# Altium PCB rookieboard_macrofab.PcbDoc (part 1 of 3)
Units mm, origin at the board's own origin, x right, y up, seen from the top; angles counter-clockwise.
Board outline 100 x 50 mm, 4 copper layers (Top Layer, Ground, Power, Bottom Layer), stack 0.971 mm thick; 136 components, 90 nets, 459 pads, 215 vias.
Unrouted connection lines stored in the file: 2.
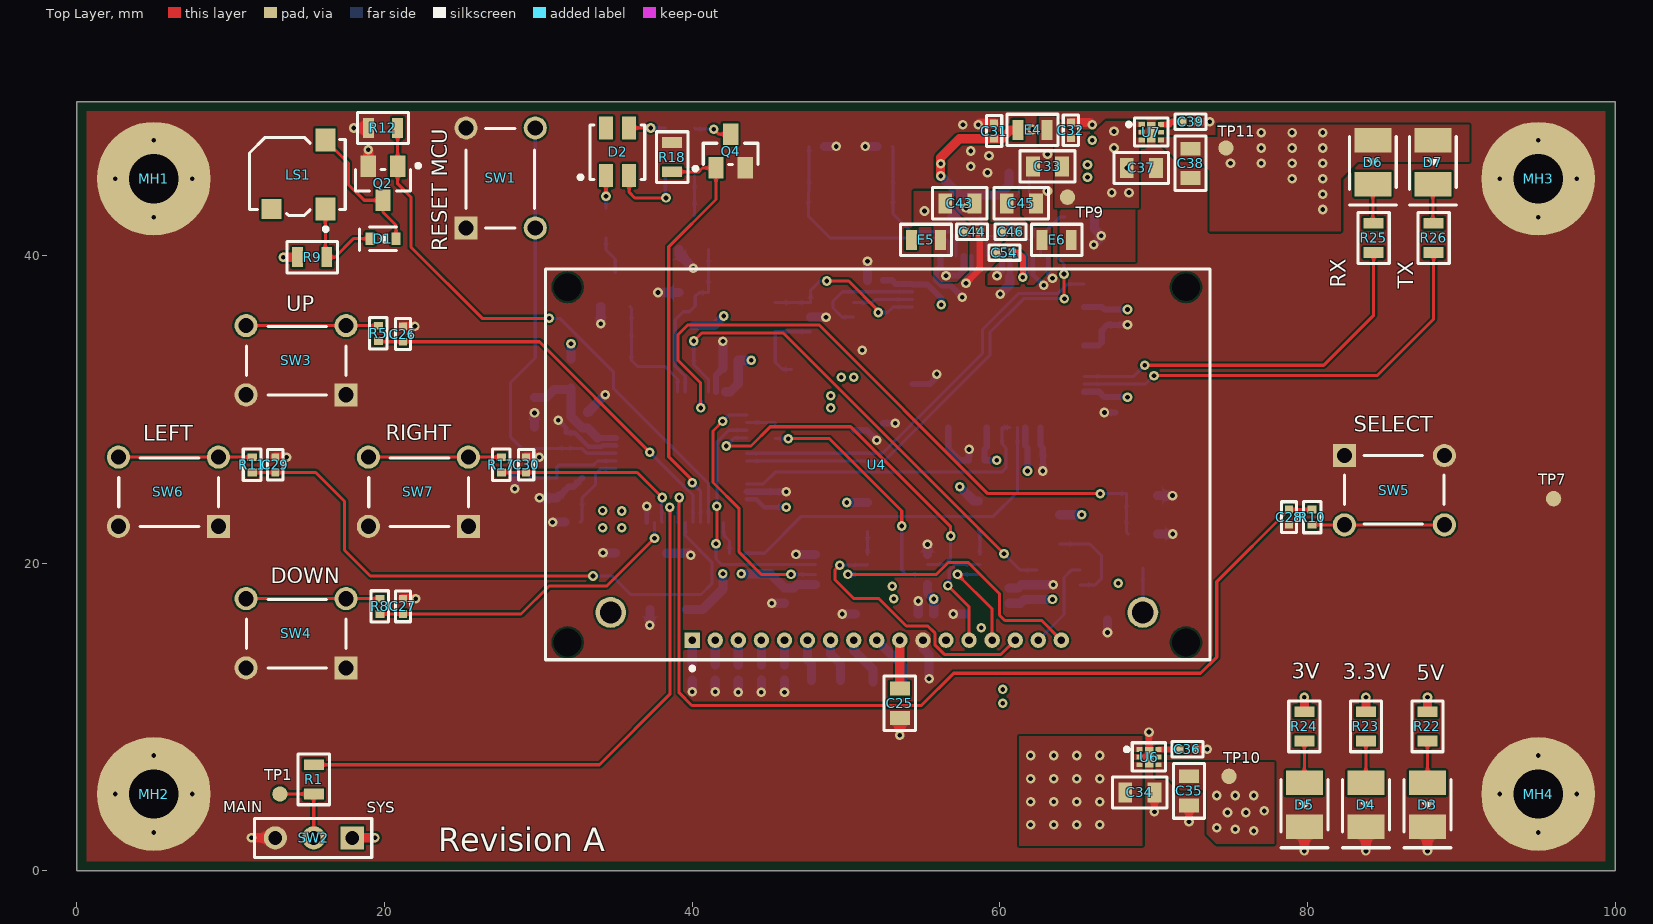
[diagram p0: Top Layer view]
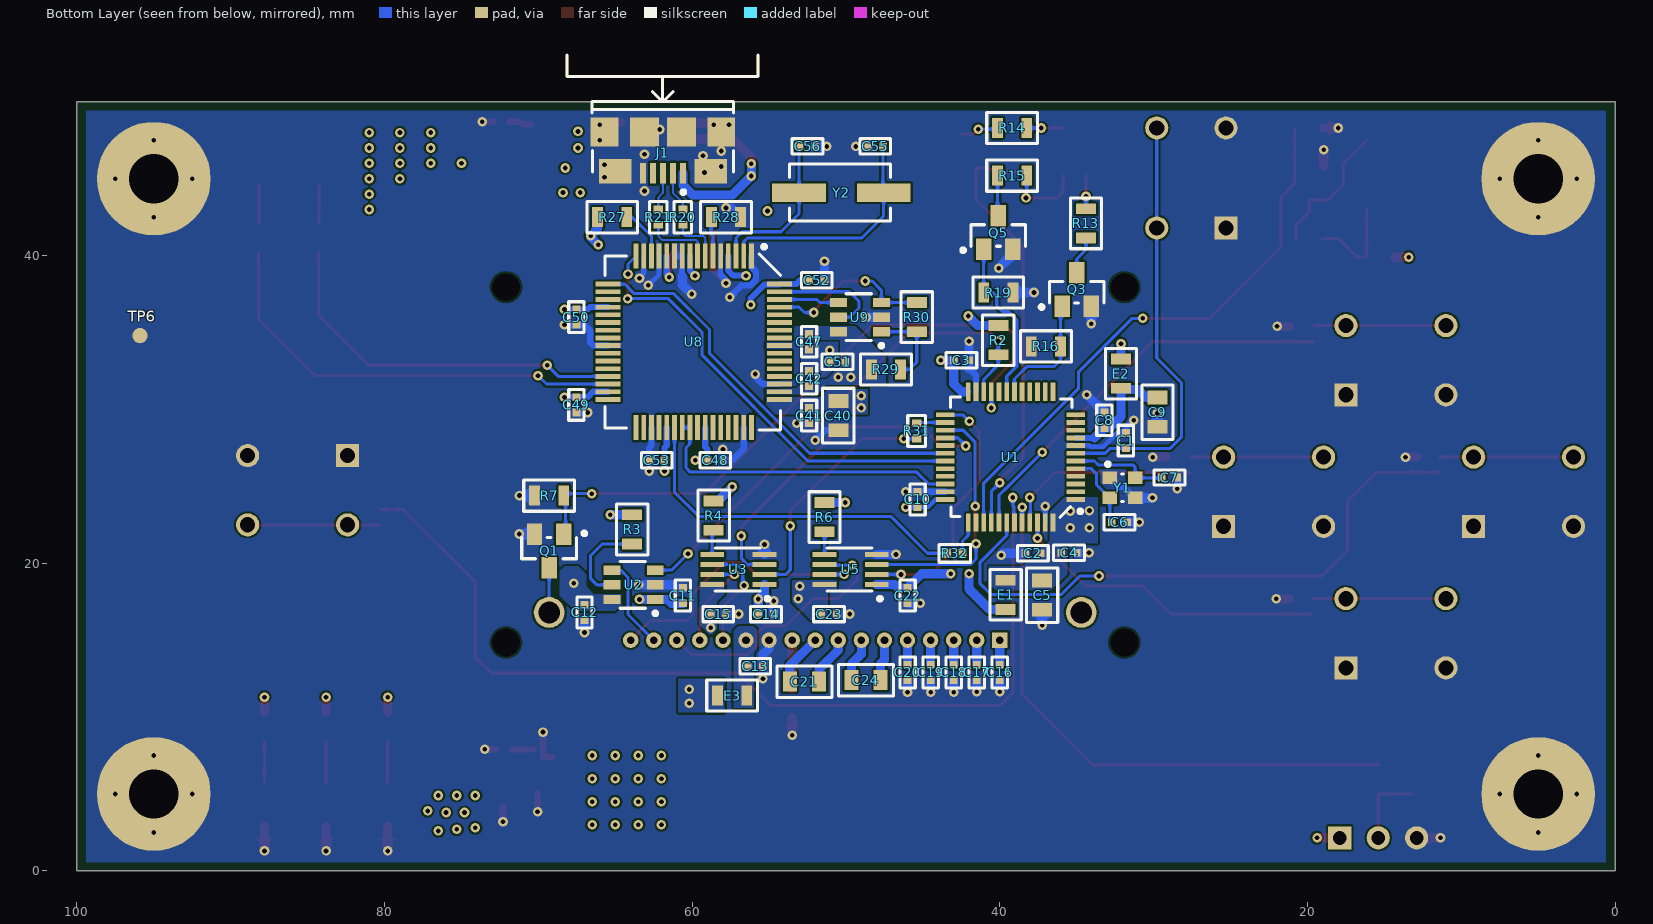
[diagram p1: Bottom Layer view, seen from below]
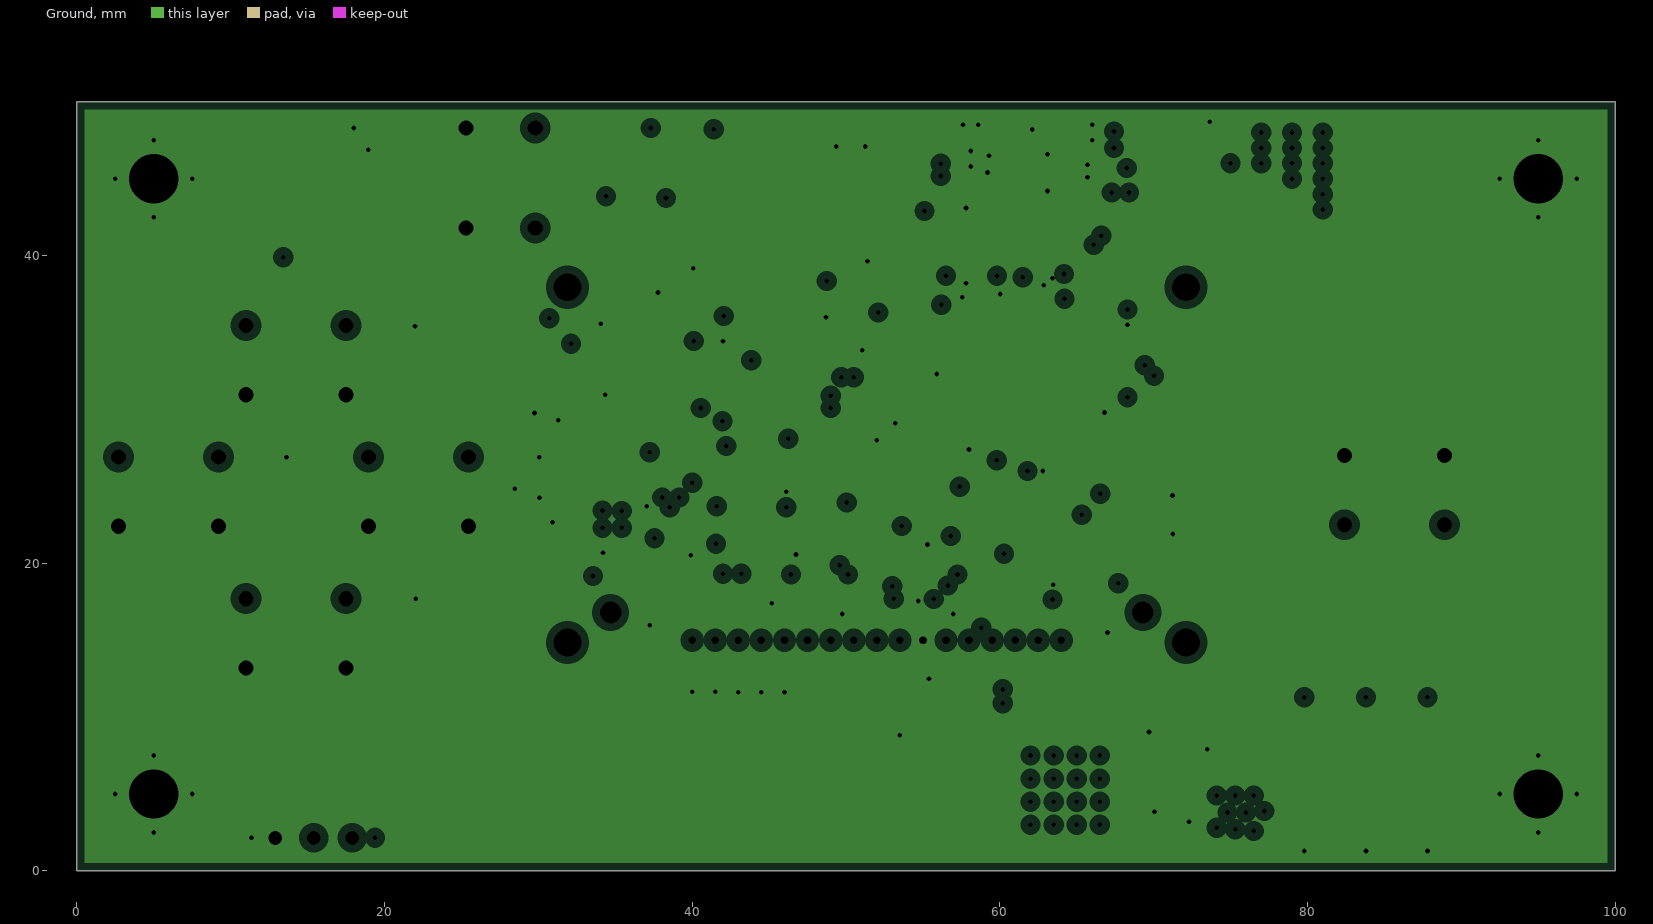
[diagram p2: Ground, clearances drawn from the general rule]
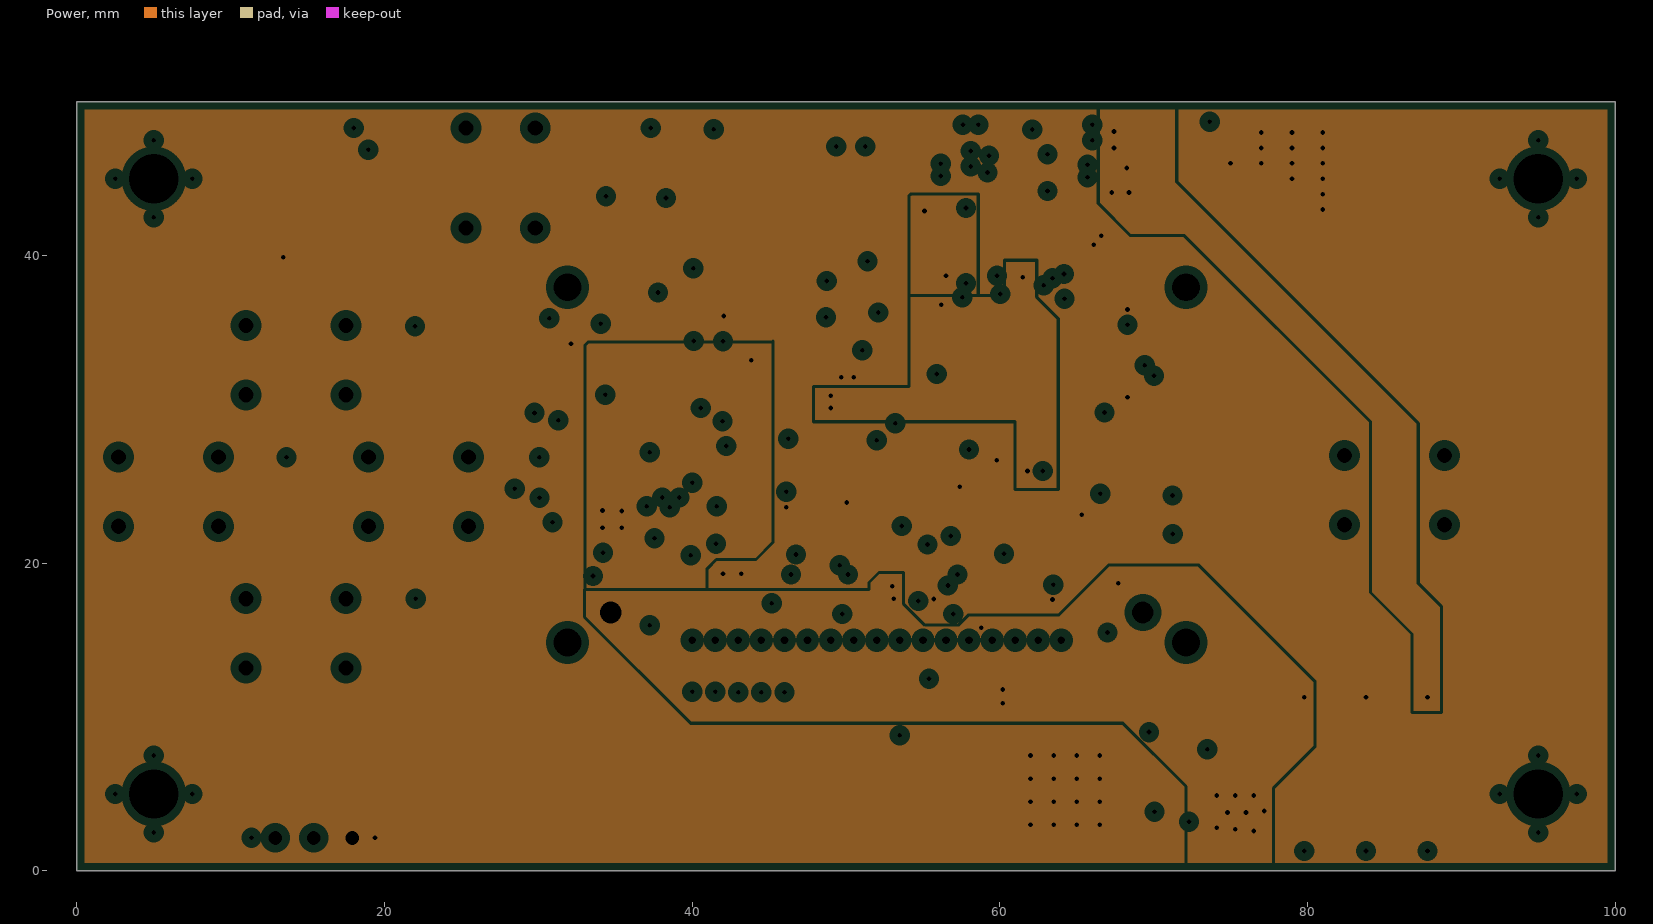
[diagram p3: Power, clearances drawn from the general rule]

## Layer stack, top to bottom
Top Solder: solder mask 0.0102, Solder Resist, Dk 3.5
Top Layer: signal copper 0.0356
Dielectric 1: dielectric 0.32, FR-4, Dk 4.8
Ground: plane copper 0.036, net GND
Dielectric 2: dielectric 0.254, Dk 4.2
Power: plane copper 0.036, net (Multiple Nets)
Dielectric 3: dielectric 0.254, Dk 4.2
Bottom Layer: signal copper 0.0356
Bottom Solder: solder mask 0.0102, Solder Resist, Dk 3.5

## Board outline
0,0 100,0 100,50 0,50

## Design rules (kind name [scope] priority, off if disabled: settings)
BoardOutlineClearance [InNetClass('All Nets')] p1: gap=0.254 ignorepadtopadclearanceinfootprint=FALSE
Clearance "Stitching +3V3" [IsStitchingVia and InNet('+3V3') vs (IsVia and (Not IsStitchingVia)) Or IsPad] p1: gap=0.127 ignorepadtopadclearanceinfootprint=FALSE
Clearance [All] p2: gap=0.127 ignorepadtopadclearanceinfootprint=FALSE
ComponentClearance [All] p1: gap=0.127 collisioncheckmode=3 verticalgap=0.127 showdistances=FALSE
HoleSize [All] p1: absolutevalues=TRUE maxlimit=10 minlimit=0.305 maxpercent=80.000 minpercent=20.000
HoleToHoleClearance [All] p1: gap=0.127 allowstackedmicrovias=TRUE
MinimumAnnularRing [All] p1: minimumring=0.16
MinimumSolderMaskSliver [All] p1: minsoldermaskwidth=0.1
PlaneClearance [All] p1: clearance=0.508
PlaneConnect [All] p1: planeconnectstyle=Direct reliefexpansion=0.508 reliefentries=4 reliefconductorwidth=0.254 reliefairgap=0.254
PolygonConnect [All] p1: connectstyle=Direct reliefconductorwidth=0.254 reliefentries=4 polygonreliefangle="90 Angle" airgapwidth=0.254
RoutingVias [All] p1: holewidth=0.305 width=0.625 viastyle="Through Hole" minholewidth=0.305 minwidth=0.625 maxholewidth=0.305 maxwidth=0.625
SilkToSilkClearance [All] p1: silktosilkclearance=0.1
SilkToSolderMaskClearance [IsPad] p1: minsilkscreentomaskgap=0.1 clearancetoexposedcopper=TRUE
SolderMaskExpansion [All] p1: expansion=0.1
UnRoutedNet [All] p1: checkbadconnections=TRUE
Width [All] p1: maxlimit=1 minlimit=0.127 preferedwidth=0.2
21 further rules are at their usual default settings.

## Components (designator, comment, footprint, x,y, rotation, side; value= is the part's Value field where it differs from the comment)
C1 "100n" C0402 31.8,27.975 r270 bottom
C2 "100n" C0402 37.85,20.65 r180 bottom
C3 "100n" C0402 42.5,33.2 r0 bottom
C4 "100n" C0402 35.5,20.675 r0 bottom
C5 "4u7 / 10V" C0805 37.25,17.925 r90 bottom
C6 "10p" C0402 32.225,22.675 r0 bottom
C7 "10p" C0402 28.975,25.575 r0 bottom
C8 "100n" C0402 33.2,29.3 r270 bottom
C9 "1u / 16V" C0805 29.75,29.825 r90 bottom
C10 "100n" C0402 45.35,24.15 r270 bottom
C11 "100n" C0402 60.6,17.9 r270 bottom
C12 "100n" C0402 67,16.8 r270 bottom
C13 "100n" C0402 55.9,13.3 r0 bottom
C14 "100n" C0402 55.2,16.7 r0 bottom
C15 "100n" C0402 58.3,16.7 r0 bottom
C16 "100n" C0402 40,12.9 r270 bottom
C17 "100n" C0402 41.5,12.9 r270 bottom
C18 "100n" C0402 43,12.9 r270 bottom
C19 "100n" C0402 44.5,12.9 r270 bottom
C20 "100n" C0402 46,12.9 r270 bottom
C21 "1u / 16V" C0805 52.7,12.3 r0 bottom
C22 "100n" C0402 46,17.9 r90 bottom
C23 "100n" C0402 51.1,16.7 r0 bottom
C24 "1u / 16V" C0805 48.7,12.4 r180 bottom
C25 "1u / 16V" C0805 53.5,10.9 r90 top
C26 "100n" C0402 21.2,34.9 r270 top
C27 "100n" C0402 21.2,17.2 r270 top
C28 "100n" C0402 78.8,23 r90 top
C29 "100n" C0402 12.9,26.4 r270 top
C30 "100n" C0402 29.2,26.4 r270 top
C31 "10n" C0402 59.625,48.1 r270 top
C32 "100n" C0402 64.625,48.15 r270 top
C33 "4u7 / 10V" C0805 63.1,45.8 r0 top
C34 "1u / 16V" C0805 69.1,5.1 r180 top
C35 "1u / 16V" C0805 72.3,5.2 r90 top
C36 "100n" C0402 72.2,7.9 r180 top
C37 "1u / 16V" C0805 69.2,45.7 r180 top
C38 "1u / 16V" C0805 72.4,46 r90 top
C39 "100n" C0402 72.4,48.7 r180 top
C40 "4u7 / 10V" C0805 50.5,29.6 r90 bottom
C41 "100n" C0402 52.4,29.6 r90 bottom
C42 "100n" C0402 52.4,32 r270 bottom
C43 "4u7 / 10V" C0805 57.4,43.4 r180 top
C44 "100n" C0402 58.2,41.55 r180 top
C45 "4u7 / 10V" C0805 61.4,43.4 r180 top
C46 "100n" C0402 60.7,41.55 r0 top
C47 "100n" C0402 52.4,34.4 r90 bottom
C48 "100n" C0402 58.5,26.7 r0 bottom
C49 "100n" C0402 67.525,30.3 r90 bottom
C50 "100n" C0402 67.525,36 r90 bottom
C51 "100n" C0402 50.55,33.1 r180 bottom
C52 "100n" C0402 51.9,38.4 r0 bottom
C53 "100n" C0402 62.3,26.7 r180 bottom
C54 "100n" C0402 60.3,40.2 r0 top
C55 "27p" C0402 48.1,47.1 r180 bottom
C56 "27p" C0402 52.5,47.1 r0 bottom
D1 "ZHCS350TA" DIODE_SOD-523 19.9,41.1 r0 top
D2 "SMTL4-RGY" SMTL4-RGY 35.15,46.75 r180 top
D3 "Green" 150141VS73100_LED 87.8,4.3 r90 top
D4 "Green" 150141VS73100_LED 83.8,4.3 r90 top
D5 "Green" 150141VS73100_LED 79.8,4.3 r90 top
D6 "Green" 150141VS73100_LED 84.25,46.075 r90 top
D7 "Green" 150141VS73100_LED 88.15,46.075 r90 top
E1 "BLM21PG221SN1D" R0805 39.625,17.95 r90 bottom
E2 "BLM21PG221SN1D" R0805 32.125,32.325 r270 bottom
E3 "BLM21PG221SN1D" R0805 57.4,11.4 r180 bottom
E4 "BLM21PG221SN1D" R0805 62.125,48.175 r0 top
E5 "BLM21PG221SN1D" R0805 55.2,41.025 r0 top
E6 "BLM21PG221SN1D" R0805 63.7,41.025 r180 top
J1 "10118192-0001LF" 10118192-0001LF 61.9,46.7 r0 bottom locked
LS1 "SMT-0540-S-R" SMT-0540-S-R 14.4,45.273 r90 top
MH1 "Mounting Hole 7.4mm, 3.2mm" MH_7.4mm_3.2mm 5,45 r0 top locked
MH2 "Mounting Hole 7.4mm, 3.2mm" MH_7.4mm_3.2mm 5,5 r0 top locked
MH3 "Mounting Hole 7.4mm, 3.2mm" MH_7.4mm_3.2mm 95,45 r0 top locked
MH4 "Mounting Hole 7.4mm, 3.2mm" MH_7.4mm_3.2mm 95,5 r0 top locked
Q1 "FDV305N" FDV305N_SOT-23-3 69.3,20.8 r270 bottom
Q2 "FDV305N" FDV305N_SOT-23-3 19.9,44.7 r270 top
Q3 "FDV305N" FDV305N_SOT-23-3 35,37.8 r90 bottom
Q4 "FDV305N" FDV305N_SOT-23-3 42.5,46.8 r90 top
Q5 "FDV305N" FDV305N_SOT-23-3 40.1,41.5 r90 bottom
R1 "10k" R0805 15.4,5.95 r90 top
R2 "10k" R0805 40.1,34.5 r90 bottom
R3 "10k" R0805 63.9,22.2 r270 bottom
R4 "10k" R0805 58.6,23.1 r270 bottom
R5 "10" R0402 19.6,34.95 r270 top
R6 "10k" R0805 51.4,23 r270 bottom
R7 "10k" R0805 69.3,24.4 r180 bottom
R8 "10" R0402 19.7,17.2 r270 top
R9 "100" R0805 15.3,39.9 r180 top
R10 "10" R0402 80.3,23 r90 top
R11 "10" R0402 11.4,26.4 r270 top
R12 "10k" R0805 19.9,48.3 r0 top
R13 "66R5" R0805 34.4,42.1 r90 bottom
R14 "66R5" R0805 39.2,48.3 r180 bottom
R15 "66R5" R0805 39.2,45.2 r180 bottom
R16 "10k" R0805 37,34.1 r180 bottom
R17 "10" R0402 27.6,26.4 r270 top
R18 "10k" R0805 38.7,46.4 r270 top
R19 "10k" R0805 40.1,37.6 r0 bottom
R20 "10" R0402 60.6,42.5 r270 bottom
R21 "10" R0402 62.2,42.5 r270 bottom
R22 "150" R0805 87.8,9.4 r90 top
R23 "66R5" R0805 83.8,9.4 r90 top
R24 "66R5" R0805 79.8,9.4 r90 top
R25 "220" R0805 84.3,41.15 r90 top
R26 "220" R0805 88.2,41.15 r90 top
R27 "1k" R0805 65.2,42.5 r180 bottom
R28 "12k" R0805 57.8,42.5 r0 bottom
R29 "10k" R0805 47.4,32.6 r180 bottom
R30 "2k" R0805 45.4,36 r90 bottom
R31 "33" R0402 45.4,28.6 r270 bottom
R32 "33" R0402 42.925,20.65 r180 bottom
SW1 "1825910-6" 1825910-6 25.3,41.8 r90 top
SW2 "EG1218" EG1218 17.9,2.15 r180 top
SW3 "1825910-6" 1825910-6 17.5,30.95 r180 top
SW4 "1825910-6" 1825910-6 17.5,13.2 r180 top
SW5 "1825910-6" 1825910-6 82.4,27 r0 top
SW6 "1825910-6" 1825910-6 9.2,22.4 r180 top
SW7 "1825910-6" 1825910-6 25.45,22.4 r180 top
TP1 "Test Pad 1mm" TP_1MM 13.2,5 r90 top
TP6 "Test Pad 1mm" TP_1MM 95.9,34.8 r90 bottom
TP7 "Test Pad 1mm" TP_1MM 96,24.2 r90 top
TP9 "Test Pad 1mm" TP_1MM 64.4,43.8 r90 top
TP10 "Test Pad 1mm" TP_1MM 74.9,6.15 r90 top
TP11 "Test Pad 1mm" TP_1MM 74.7,47 r90 top
U1 "STM32L071C8T6" LQFP48 39.3,26.9 r90 bottom
U2 "SN74LVC1T45DBVR" SOT-23-6 63.8,18.6 r0 bottom
U3 "SN74LVC2T45DCTR" SOP8 57,19.6 r0 bottom
U4 "NHD-C12832A1Z-FSW-FBW-3V3" NHD-C12832A1Z-FSW-FBW-3V3 40,15 r0 top
U5 "SN74LVC2T45DCTR" SOP8 49.7,19.6 r0 bottom
U6 "MIC5353-3.0YMT-TR" 6-MLF 69.7,7.4 r270 top
U7 "MIC5353-3.3YMT-TR" 6-MLF 69.85,48.025 r270 top
U8 "FT2232HL-REEL" LQFP64 59.9,34.4 r270 bottom locked
U9 "93LC56BT-I/OT" SOT-23-6 49.1,36 r0 bottom
Y1 "24MHz" ABM10AIG-24.000MHZ-4Z-T3 32.025,24.9 r180 bottom
Y2 "12MHz" ABLS7M2-12.000MHZ-D-2Y-T 50.3,44.1 r180 bottom

## Footprints (in the part's own frame and the unit in brackets; to place one, negate y for a bottom-side part, rotate by r counter-clockwise, add the part's x,y. Pads: shape width x height; smd on the part's side, far side on the other; paste and mask are expansions set on the pad)
6-MLF [mm]
  rect 0.31x0.4 smd mask+0.01: 1(-0.5,-0.625) 2(0,-0.625) 4(0.5,0.625) 5(0,0.625) 6(-0.5,0.625)
  rect 0.4x0.5 on Top Paste: 2(-0.425,0) 2(0,0) 2(0.425,0)
  rect 0.31x0.4 smd paste+0 mask+0.01: 3(0.5,-0.625)
  rect 1.31x0.55 smd paste-40 mask+0.01: 7(0.008,0)
  silkscreen extent -0.93,-1.58 0.9,1.08
150141VS73100_LED [mm]
  rect 1.6x2.4 smd: 1(-1.425,0) 2(1.425,0)
  silkscreen extent -2.79,-1.52 1.65,1.52
1825910-6 [mm]
  rect 1.5x1.5 hole 0.99: 1(0,0)
  round 1.5 hole 0.99: 2(6.5,0) 3(0,-4.5) 4(6.5,-4.5)
  silkscreen extent 0,-4.44 6.48,0
10118192-0001LF [mm]
  rect 0.4x1.35 smd mask+0.05: 1(-1.3,1.338) 2(-0.65,1.338) 3(0,1.338) 4(0.65,1.338) 5(1.3,1.338)
  rect 2.1x1.6 smd: 6(-3.1,1.213) 7(3.1,1.213)
  rect 1.8x1.9 smd: 8(-3.8,-1.337) 11(3.8,-1.337)
  rect 1.9x1.9 smd: 9(-1.2,-1.337) 10(1.2,-1.337)
  silkscreen extent -6.17,-6.35 6.23,2.7
ABLS7M2-12.000MHZ-D-2Y-T [mm]
  rect 3.5x1.2 smd: 1(-2.75,0) 2(2.75,0)
  silkscreen extent -3.37,-1.85 3.2,1.85
ABM10AIG-24.000MHZ-4Z-T3 [mm]
  rect 0.95x0.8 smd: 1(-0.825,-0.65) 2(0.825,-0.65) 3(0.825,0.65) 4(-0.825,0.65)
  silkscreen extent -1.08,-0.87 0.06,1.66
C0402 [mm]
  rect 0.5x0.5 smd: 1(-0.5,0) 2(0.5,0)
  silkscreen extent -1,-0.5 1,0.5
C0805 [mm]
  rect 0.9x1.3 smd: 1(-0.95,0) 2(0.95,0)
  silkscreen extent -1.78,-1.02 1.78,1.02
DIODE_SOD-523 [mm]
  rect 0.6x0.8 smd: 1(0.85,0) 2(-0.85,0)
  silkscreen extent -1.52,-0.76 0.89,0.76
EG1218 [mm]
  rect 1.5x1.5 hole 0.9: 1(0,0)
  round 1.5 hole 0.9: 2(2.5,0) 3(5,0)
  silkscreen extent -1.27,-1.27 6.35,1.27
FDV305N_SOT-23-3 [mm]
  rect 1.4x1 smd: 1(-1.1,0.95) 2(-1.1,-0.95) 3(1.1,0)
  silkscreen extent -1.27,-1.78 0.51,2.41
LQFP48 [mm]
  rect 0.31x1.2 smd mask+0.03: 1(-2.75,-4.25) 2(-2.25,-4.25) 3(-1.75,-4.25) 4(-1.25,-4.25) 5(-0.75,-4.25) 6(-0.25,-4.25) 7(0.25,-4.25) 8(0.75,-4.25) 9(1.25,-4.25) 10(1.75,-4.25) 11(2.25,-4.25) 12(2.75,-4.25) 25(2.75,4.25) 26(2.25,4.25) 27(1.75,4.25) 28(1.25,4.25) 29(0.75,4.25) 30(0.25,4.25) 31(-0.25,4.25) 32(-0.75,4.25) 33(-1.25,4.25) 34(-1.75,4.25) 35(-2.25,4.25) 36(-2.75,4.25)
  rect 1.2x0.31 smd mask+0.03: 13(4.25,-2.75) 14(4.25,-2.25) 15(4.25,-1.75) 16(4.25,-1.25) 17(4.25,-0.75) 18(4.25,-0.25) 19(4.25,0.25) 20(4.25,0.75) 21(4.25,1.25) 22(4.25,1.75) 23(4.25,2.25) 24(4.25,2.75) 37(-4.25,2.75) 38(-4.25,2.25) 39(-4.25,1.75) 40(-4.25,1.25) 41(-4.25,0.75) 42(-4.25,0.25) 43(-4.25,-0.25) 44(-4.25,-0.75) 45(-4.25,-1.25) 46(-4.25,-1.75) 47(-4.25,-2.25) 48(-4.25,-2.75)
  silkscreen extent -3.92,-4.65 3.9,3.9
LQFP64 [mm]
  rect 1.65x0.31 smd mask+0.03: 1(-5.575,3.75) 2(-5.575,3.25) 3(-5.575,2.75) 4(-5.575,2.25) 5(-5.575,1.75) 6(-5.575,1.25) 7(-5.575,0.75) 8(-5.575,0.25) 9(-5.575,-0.25) 10(-5.575,-0.75) 11(-5.575,-1.25) 12(-5.575,-1.75) 13(-5.575,-2.25) 14(-5.575,-2.75) 15(-5.575,-3.25) 16(-5.575,-3.75) 33(5.575,-3.75) 34(5.575,-3.25) 35(5.575,-2.75) 36(5.575,-2.25) 37(5.575,-1.75) 38(5.575,-1.25) 39(5.575,-0.75) 40(5.575,-0.25) 41(5.575,0.25) 42(5.575,0.75) 43(5.575,1.25) 44(5.575,1.75) 45(5.575,2.25) 46(5.575,2.75) 47(5.575,3.25) 48(5.575,3.75)
  rect 0.31x1.65 smd mask+0.03: 17(-3.75,-5.575) 18(-3.25,-5.575) 19(-2.75,-5.575) 20(-2.25,-5.575) 21(-1.75,-5.575) 22(-1.25,-5.575) 23(-0.75,-5.575) 24(-0.25,-5.575) 25(0.25,-5.575) 26(0.75,-5.575) 27(1.25,-5.575) 28(1.75,-5.575) 29(2.25,-5.575) 30(2.75,-5.575) 31(3.25,-5.575) 32(3.75,-5.575) 49(3.75,5.575) 50(3.25,5.575) 51(2.75,5.575) 52(2.25,5.575) 53(1.75,5.575) 54(1.25,5.575) 55(0.75,5.575) 56(0.25,5.575) 57(-0.25,5.575) 58(-0.75,5.575) 59(-1.25,5.575) 60(-1.75,5.575) 61(-2.25,5.575) 62(-2.75,5.575) 63(-3.25,5.575) 64(-3.75,5.575)
  silkscreen extent -6.3,-5.78 5.73,5.65
MH_7.4mm_3.2mm [mm]
  round 7.4 hole 3.2: 1(0,0)
NHD-C12832A1Z-FSW-FBW-3V3 [mm]
  rect 1x1 hole 0.5: 1(0,0)
  round 1 hole 0.5: 2(1.5,0) 3(3,0) 4(4.5,0) 5(6,0) 6(7.5,0) 7(9,0) 8(10.5,0) 9(12,0) 10(13.5,0) 11(15,0) 12(16.5,0) 13(18,0) 14(19.5,0) 15(21,0) 16(22.5,0) 17(24,0)
  round 2 hole 1.4: 18(-5.3,1.8) 19(29.3,1.8)
  round 0 hole 1.8 unplated: 20(-8.1,-0.15) 20(-8.1,22.95) 20(32.1,-0.15) 20(32.1,22.95)
  silkscreen extent -9.52,-1.96 33.66,24.13
R0402 [mm]
  rect 0.5x0.6 smd: 1(-0.5,0) 2(0.5,0)
  silkscreen extent -1.02,-0.58 1.02,0.56
R0805 [mm]
  rect 0.7x1.3 smd: 1(-0.95,0) 2(0.95,0)
  silkscreen extent -1.65,-1.02 1.65,1.02
SMT-0540-S-R [mm]
  rect 1.5x1.3 smd: 1(-2.25,-1.75) 2(2.25,-1.75)
  rect 1.3x1.3 smd: 3(-2.25,1.75)
  silkscreen extent -3.68,-3.05 2.41,3.17
SMTL4-RGY [mm]
  rect 0.9x1.5 smd: 1(-0.75,1.55) 2(-0.75,-1.55) 3(0.75,1.55) 4(0.75,-1.55)
  silkscreen extent -1.77,-1.75 2.54,1.8
SOP8 [mm]
  rect 1.55x0.31 smd mask+0.07: 1(-1.7,0.975) 2(-1.7,0.325) 3(-1.7,-0.325) 4(-1.7,-0.975) 5(1.7,-0.975) 6(1.7,-0.325) 7(1.7,0.325) 8(1.7,0.975)
  silkscreen extent -2.03,-1.4 1.52,2.03
SOT-23-6 [mm]
  rect 1.1x0.6 smd mask+0.05: 1(-1.4,0.95) 2(-1.4,0) 3(-1.4,-0.95) 4(1.4,-0.95) 5(1.4,0) 6(1.4,0.95)
  silkscreen extent -1.52,-1.52 0.89,1.98
TP_1MM [mm]
  round 1 smd paste-1: 1(0,0)

## Part data
C1 C2 C3 C4 C8 C10 C11 C12 C13 C14 C15 C16 C17 C18 C19 C20 C22 C23 C26 C27 C28 C29 C30 C32 C36 C39 C41 C42 C44 C46 C47 C48 C49 C50 C51 C52 C53 C54: library part CGA2B3X7R1E104K050BB, "TDK         CGA2B3X7R1E104K050BB             SMD Multilayer Ceramic Capacitor, 0402 [1005 Metric], 0.1 F, 25 V,  10%, X7R, CGA Series", Capacitance=0.1µF, Manufacturer=TDK, Operating Temperature="-55°C ~ 125°C", Package / Case="0402 (1005 Metric)", PCN Part Number="MLCC Part Number Change 30/Nov/2012", Ratings=AEC-Q200, Standard Package=1, Supplier Part Number 1=445-6902-1-ND, Temperature Coefficient=X7R, Tolerance=±10%, Voltage - Rated=25V, Applications=Automotive, Category=Capacitors, ComponentLink1Description=http://www.farnell.com/datasheets/1735392.pdf, ComponentLink1URL=http://www.farnell.com/datasheets/1735392.pdf, ComponentLink2Description=http://www.mouser.com/ds/2/400/lcc_automotive_general_en-843974.pdf, ComponentLink2URL=http://www.mouser.com/ds/2/400/lcc_automotive_general_en-843974.pdf, Family="Ceramic Capacitors", Featured Product="CGA Series MLCC Capacitors", Features=-, Height - Seated (Max)=-, Lead Spacing=-, Lead Style=-, Manufacturer Part Number=CGA2B3X7R1E104K050BB, Mounting Type="Surface Mount, MLCC", Online Catalog="CGA Series, Automotive General, Mid and High Voltage", Other Names=445-6902-6, Packaging=Digi-Reel®, Pricing 1="1=0.16, 10=0.115, 100=0.054, 500=0.0379, 1000=0.0314, 2500=0.0292, 5000=0.0267 (USD)", Product Training Modules="CGA Series for Automotive Applications SEAT, CCV, and TVCL Design Tools Guide to Replacing an Electrolytic Capacitor with an MLCC", RoHS Information="RoHS Certificate-MLCC", Series=CGA, Size / Dimension="0.039\" L x 0.020\" W (1.00mm x 0.50mm)", Stock 1=100000, Supplier 1=Digi-Key, Thickness (Max)="0.022\" (0.55mm)"
C5 C33 C40 C43 C45: library part C2012X7R1A475K085AC, "4.7µF ±10% 10V X7R Ceramic Capacitor -55°C ~ 125°C Surface Mount, MLCC 0805 (2012 Metric) 0.079\" L x 0.049\" W (2.00mm x 1.25mm)", Capacitance=4.7µF, Manufacturer=TDK, Operating Temperature="-55°C ~ 125°C", Package / Case="0805 (2012 Metric)", Standard Package=1, Supplier Part Number 1=445-14527-1-ND, Temperature Coefficient=X7R, Tolerance=±10%, Voltage - Rated=10V, Applications="General Purpose", Category=Capacitors, EDA / CAD Models="Download from Accelerated Designs", Family="Ceramic Capacitors", Manufacturer Part Number=C2012X7R1A475K085AC, Mounting Type="Surface Mount, MLCC", Online Catalog="C Series, General Purpose", Other Names=445-14527-6, Packaging=Digi-Reel®, Pricing 1="1=0.28, 10=0.19, 100=0.1075, 500=0.0759, 1000=0.0664 (USD)", Product Training Modules="C Series General Applications SEAT, CCV, and TVCL Design Tools Guide to Replacing an Electrolytic Capacitor with an MLCC", RoHS Information="RoHS Certificate-MLCC", Series=C, Size / Dimension="0.079\" L x 0.049\" W (2.00mm x 1.25mm)", Stock 1=1, Supplier 1=Digi-Key, Thickness (Max)="0.039\" (1.00mm)"
C6 C7: library part CC0402FRNPO9BN100, "Cap Ceramic 10pF 50V C0G 1% SMD 0402 125C Paper T/R", Capacitance=10pF, Case Style="Ceramic Chip", Manufacturer=Yageo, Operating Temp Range="-55C to 125C", Package / Case=0402, Supplier Part Number 1=311-1640-1-ND, Temp Coeff (Dielectric)=C0G, Tolerance (+ or -)=1%, Voltage=50VDC, ComponentLink1Description=http://www.yageo.com/documents/recent/UPY-GP_NP0_16V-to-50V_8.pdf, ComponentLink1URL=http://www.yageo.com/documents/recent/UPY-GP_NP0_16V-to-50V_8.pdf, Construction="SMT Chip", Failure Rate="Not Required", Manufacturer Part Number=CC0402FRNPO9BN100, Mounting Style="Surface Mount", Packaging="Tape and Reel", Pricing 1="1=0.14, 10=0.104, 100=0.0464, 500=0.0331, 1000=0.026, 2500=0.0237, 5000=0.0218 (USD)", Product Depth (mm)=0.5mm, Product Diameter (mm)="Not Requiredmm", Product Height (mm)=0.5mm, Product Length (mm)=1mm, Stock 1=82755, Supplier 1=Digi-Key, Wire Form="Not Required"
C9 C21 C24 C25 C34 C35 C37 C38: library part C0805C105K4RAC7800, "Multilayer Ceramic Capacitors MLCC - SMD/SMT 16volts 1uF X7R 10%", Capacitance Value="1 uF", Dielectric=X7R, Manufacturer=KEMET, Operating Temperature="-55 to 125 °C", Package/Case=0805, Supplier Part Number 1=399-1284-1-ND, Tolerance="10 %", Voltage="16 Vdc", Category="Capacitor Ceramic Multilayer", Construction=Flat, Manufacturer Part Number=C0805C105K4RAC7800, Mounting="Surface Mount", Pricing 1="1=0.17, 10=0.124, 100=0.0581, 500=0.0408, 1000=0.0337 (USD)", Product Depth="1.25 mm", Product Height="0.9 mm", Product Length="2 mm", Rad Hard=No, Stock 1=40000, Supplier 1=Digi-Key
C31: library part CGA2B3X7R1V103K050BB, "TDK         CGA2B3X7R1V103K050BB             SMD Multilayer Ceramic Capacitor, 0402 [1005 Metric], 0.01 F, 35 V,  10%, X7R, CGA Series", Capacitance=10000pF, Manufacturer=TDK, Operating Temperature="-55°C ~ 125°C", Package / Case="0402 (1005 Metric)", PCN Part Number="MLCC Part Number Change 30/Nov/2012", Ratings=AEC-Q200, Standard Package=1, Supplier Part Number 1=445-6900-1-ND, Temperature Coefficient=X7R, Tolerance=±10%, Voltage - Rated=35V, Applications=Automotive, Category=Capacitors, ComponentLink1Description=http://www.farnell.com/datasheets/1807242.pdf, ComponentLink1URL=http://www.farnell.com/datasheets/1807242.pdf, ComponentLink2Description=http://www.mouser.com/ds/2/400/lcc_automotive_general_en-843974.pdf, ComponentLink2URL=http://www.mouser.com/ds/2/400/lcc_automotive_general_en-843974.pdf, Family="Ceramic Capacitors", Featured Product="CGA Series MLCC Capacitors", Features=-, Height - Seated (Max)=-, Lead Spacing=-, Lead Style=-, Manufacturer Part Number=CGA2B3X7R1V103K050BB, Mounting Type="Surface Mount, MLCC", Online Catalog="CGA Series, Automotive General, Mid and High Voltage", Other Names=445-6900-6, Packaging=Digi-Reel®, Pricing 1="1=0.11, 10=0.083, 100=0.0372, 500=0.0265, 1000=0.0209, 2500=0.019, 5000=0.0174 (USD)", Product Training Modules="CGA Series for Automotive Applications SEAT, CCV, and TVCL Design Tools Guide to Replacing an Electrolytic Capacitor with an MLCC", RoHS Information="RoHS Certificate-MLCC", Series=CGA, Size / Dimension="0.039\" L x 0.020\" W (1.00mm x 0.50mm)", Stock 1=100000, Supplier 1=Digi-Key, Thickness (Max)="0.022\" (0.55mm)"
C55 C56: library part GJM1555C1H270FB01D, Manufacturer=Murata, Supplier Part Number 1=490-16380-1-ND, ComponentLink1Description=http://datasheet.octopart.com/GJM1555C1H270FB01D-Murata-datasheet-8819587.pdf, ComponentLink1URL=http://datasheet.octopart.com/GJM1555C1H270FB01D-Murata-datasheet-8819587.pdf, ComponentLink2Description=http://datasheet.octopart.com/GJM1555C1H270FB01D-Murata-datasheet-10025737.pdf, ComponentLink2URL=http://datasheet.octopart.com/GJM1555C1H270FB01D-Murata-datasheet-10025737.pdf, ComponentLink3Description=http://datasheet.octopart.com/GJM1555C1H270FB01D-Murata-datasheet-11978611.pdf, ComponentLink3URL=http://datasheet.octopart.com/GJM1555C1H270FB01D-Murata-datasheet-11978611.pdf, ComponentLink4Description=http://datasheet.octopart.com/GJM1555C1H270FB01D-Murata-datasheet-12510076.pdf, ComponentLink4URL=http://datasheet.octopart.com/GJM1555C1H270FB01D-Murata-datasheet-12510076.pdf, ComponentLink5Description=http://datasheet.octopart.com/GJM1555C1H270FB01D-Murata-datasheet-12515295.pdf, ComponentLink5URL=http://datasheet.octopart.com/GJM1555C1H270FB01D-Murata-datasheet-12515295.pdf, Manufacturer Part Number=GJM1555C1H270FB01D, Pricing 1="1=0.23, 10=0.155, 100=0.0784, 500=0.0536, 1000=0.0474, 2500=0.0454, 5000=0.0413 (USD)", Stock 1=14501, Supplier 1=Digi-Key
D1: "DIODE SCHOTTKY 40V 350MA SOD523", If - Forward Current="0.51 A", Ifsm - Forward Surge Current="4.2 A", Ir - Reverse Current="12 uA at 30 V", Manufacturer="Diodes Zetex", Maximum Operating Temperature="+ 125 C", Minimum Operating Temperature="- 55 C", Package / Case=SOD-523, Supplier Part Number 1=ZHCS350TACT-ND, Vf - Forward Voltage="0.81 V at 0.35 A", Vrrm - Repetitive Reverse Voltage="40 V", Brand="Diodes Incorporated", ComponentLink1Description=http://www.farnell.com/datasheets/2238072.pdf, ComponentLink1URL=http://www.farnell.com/datasheets/2238072.pdf, ComponentLink2Description=http://www.diodes.com/datasheets/ZHCS350.pdf, ComponentLink2URL=http://www.diodes.com/datasheets/ZHCS350.pdf, ComponentLink3Description=http://www.farnell.com/datasheets/13262.pdf, ComponentLink3URL=http://www.farnell.com/datasheets/13262.pdf, ComponentLink4Description=http://www.diodes.com///datasheets/ZHCS350.pdf, ComponentLink4URL=http://www.diodes.com///datasheets/ZHCS350.pdf, ComponentLink5Description=https://www.diodes.com/assets/Datasheets/ZHCS350.pdf, ComponentLink5URL=https://www.diodes.com/assets/Datasheets/ZHCS350.pdf, ComponentLink6Description=http://www.mouser.com/ds/2/115/ZHCS350-93341.pdf, ComponentLink6URL=http://www.mouser.com/ds/2/115/ZHCS350-93341.pdf, Configuration=Single, Factory Pack Quantity=3000, Height="0.8 mm", Length="1.3 mm", Manufacturer Part Number=ZHCS350TA, Mounting Style=SMD/SMT, Operating Temperature Range="+ 125 C", Packaging=Reel, Pricing 1="1=0.45, 10=0.382, 100=0.2855, 500=0.2243, 1000=0.1734 (USD)", Product="Schottky Diodes", Product Category="Schottky Diodes & Rectifiers", RoHS=True, Series=ZHCS350, Stock 1=263997, Supplier 1=Digi-Key, Technology=Si, Termination Style=SMD/SMT, trr - Reverse Recovery time="1.6 ns", Type="Schottky Diode", Unit Weight="0.000035 oz", Width="0.9 mm"
D2: "Green, Red, Yellow 570nm Green, 640nm Red, 585nm Yellow LED Indication - Discrete 1.9V Green, 1.85V Red, 1.9V Yellow 4-PLCC", Color="Green, Red, Yellow", Current - Test="20mA Green, 20mA Red, 20mA Yellow", Lens Color=Colorless, Manufacturer=Bivar, Millicandela Rating="40mcd Green, 36mcd Red, 16mcd Yellow", Package / Case=4-PLCC, Supplier Part Number 1=492-2173-1-ND, Voltage - Forward (Vf) (Typ)="1.9V Green, 1.85V Red, 1.9V Yellow", Category=Optoelectronics, Family="LED Indication - Discrete", Features=-, Height (Max)=2.05mm, Lens Style/Size="Round with Flat Top, 2.40mm", Lens Transparency=Clear, Manufacturer Part Number=SMTL4-RGY, Mounting Type="Surface Mount", Packaging="Tape & Reel (TR)", Part Status=Active, Pricing 1="1=1.65, 10=1.338, 25=1.0296, 100=0.9266, 250=0.8237, 500=0.7001, 1000=0.5766 (USD)", Series=-, Size / Dimension="3.20mm L x 2.80mm W", Stock 1=53898, Supplier 1=Digi-Key, Supplier Device Package=4-PLCC, Viewing Angle=120°, Wavelength - Dominant="570nm Green, 640nm Red, 585nm Yellow", Wavelength - Peak=-
D3 D4 D5 D6 D7: library part 150141VS73100, "WURTH ELEKTRONIK   150141VS73100   LED, GREEN, 90MCD, 570NM", Current - Test=20mA, Manufacturer="Wurth Electronics", Millicandela Rating=90mcd, Package / Case=2-PLCC, Standard Package=1, Supplier Part Number 1=732-5002-1-ND, Voltage - Forward (Vf) (Typ)=2V, 3D Model="SMTW_3528.igs /  / SMTW_3528.stp /  / SMTW_3528.wrl", Category=Optoelectronics, Color=Green, Dynamic Catalog="3.5mm x 2.8mm Round with Flat Top LEDs", Family="LED Indication - Discrete", Height=2.10mm, Lens Style/Size="Round with Flat Top, 2.4mm", Lens Type=Clear, Manufacturer Part Number=150141VS73100, Mounting Type="Surface Mount", Online Catalog="3.5mm x 2.8mm Round with Flat Top LEDs", Other Names=732-5002-1, Packaging="Cut Tape (CT)", Pricing 1="1=0.17, 100=0.149, 500=0.113 (USD)", Series=WL-SMTW, Size / Dimension="3.20mm L x 2.80mm W", Stock 1=7722, Supplier 1=Digi-Key, Viewing Angle=120°, Wavelength - Dominant=570nm, Wavelength - Peak=572nm
E1 E2 E3 E4 E5 E6: "FERRITE CHIP 220 OHM 0805", Current Rating (Max)=2A, DC Resistance (DCR) (Max)="45 mOhm", Impedance @ Frequency="220 Ohm @ 100MHz", Manufacturer=Murata, Operating Temperature="-55°C ~ 125°C", Package / Case="0805 (2012 Metric)", Ratings=-, Standard Package=1, Supplier Part Number 1=490-1054-1-ND, Catalog Drawings="BLM21 Series Side BLM21 Series Top", Category=Filters, EDA / CAD Models="Download from Accelerated Designs", Family="Ferrite Beads and Chips", Filter Type="Power Line", Height (Max)="0.041\" (1.05mm)", Manufacturer Part Number=BLM21PG221SN1D, Mounting Type="Surface Mount", Number of Lines=1, Online Catalog="EMIFIL® BLM21P Series", Other Names=490-1054-6, Packaging=Digi-Reel®, Pricing 1="1=0.1, 10=0.081, 25=0.0732, 50=0.0538, 100=0.0464, 250=0.0366, 500=0.0309, 1000=0.0261 (USD)", Product Training Modules="Ferrite Beads and Arrays", Series=BLM21P, Size / Dimension="0.079\" L x 0.049\" W (2.00mm x 1.25mm)", Stock 1=1796179, Supplier 1=Digi-Key
J1: "USB - micro B USB 2.0 Receptacle Connector 5 Position Surface Mount, Right Angle, Horizontal", Color=Black, Current Rating="1.8 A", Flammability Rating="UL 94 V-0", Insulation Resistance="1000 MOhms", Manufacturer="Amphenol FCI", Operating Temperature Range="- 55 C to + 85 C", Supplier Part Number 1=609-4613-1-ND, Brand=FCI, Connector Type="Micro USB Type B receptacle", Contact Material="Copper Alloy", Contact Plating=Gold, Factory Pack Quantity=1400, Gender=Female, Manufacturer Part Number=10118192-0001LF, Mounting Angle=Right, Number of Contacts="5 Contact", Packaging=Reel, Pricing 1="1=0.42, 10=0.393, 25=0.3536, 50=0.3144, 100=0.3013, 250=0.2751, 500=0.262 (USD)", Product="Micro USB Type B Connectors", Product Category="USB Connectors", RoHS=Details, Standard="USB 2.0", Stock 1=158518, Supplier 1=Digi-Key, Termination Style=SMD/SMT
LS1: "BUZZER MAGNETIC 3V 5MM SMD", Frequency="4 kHz", Manufacturer="Projects Unlimited", Operating Temperature Range="- 40 C to + 85 C", Supplier Part Number 1=668-1060-1-ND, Brand="PUI Audio", ComponentLink1Description=http://www.mouser.com/ds/2/334/SMT-0540-S-R-44003.pdf, ComponentLink1URL=http://www.mouser.com/ds/2/334/SMT-0540-S-R-44003.pdf, ComponentLink2Description=http://www.puiaudio.com/pdf/SMT-0540-S-R.pdf, ComponentLink2URL=http://www.puiaudio.com/pdf/SMT-0540-S-R.pdf, ComponentLink3Description=http://www.farnell.com/datasheets/1916494.pdf, ComponentLink3URL=http://www.farnell.com/datasheets/1916494.pdf, Depth="2 mm", Factory Pack Quantity=2000, Length="5 mm", Length - in="0.197 in", Length - mm="5 mm", Manufacturer Part Number=SMT-0540-S-R, Packaging=Reel, Pricing 1="1=3.13, 10=2.476, 25=2.2596, 50=2.1106, 100=1.9619, 250=1.7995, 500=1.6913 (USD)", Product=Transducers, Product Category="Speakers & Transducers", RoHS=True, Shape=Square, Sound Pressure Level="78 dBA", Stock 1=22701, Supplier 1=Digi-Key, Termination Style="Gullwing Lead", Type=Electromagnetic, Width="5 mm", Width - in="0.197 in", Width - mm="5 mm"
MH1 MH2 MH3 MH4: library part MOUNT_HOLE_7.4mm_3.2mm
Q1 Q2 Q3 Q4 Q5: "MOSFET N-CH 20V 0.9A SOT-23", Manufacturer="ON Semiconductor / Fairchild", Maximum Continuous Drain Current="0.9 A", Maximum Drain Source Resistance="0.22 O", Maximum Drain Source Voltage="20 V", Maximum Gate Source Voltage="±12 V", Maximum Operating Temperature="+150 °C", Maximum Power Dissipation="0.35 W", Minimum Gate Threshold Voltage=0.6V, Minimum Operating Temperature="-55 °C", Package Type=SOT-23, Supplier Part Number 1=FDV305NCT-ND, Typical Input Capacitance @ Vds="109 pF@ 10 V", Category="Power MOSFET", Channel Mode=Enhancement, Channel Type=N, ComponentLink1Description=http://www.jameco.com/Jameco/Products/ProdDS/899087.pdf, ComponentLink1URL=http://www.jameco.com/Jameco/Products/ProdDS/899087.pdf, ComponentLink2Description=http://www.mouser.com/ds/2/149/FDV305N-79611.pdf, ComponentLink2URL=http://www.mouser.com/ds/2/149/FDV305N-79611.pdf, ComponentLink3Description=https://www.fairchildsemi.com/package-drawings/MA/MA03B.pdf, ComponentLink3URL=https://www.fairchildsemi.com/package-drawings/MA/MA03B.pdf, ComponentLink4Description=http://www.farnell.com/datasheets/184807.pdf, ComponentLink4URL=http://www.farnell.com/datasheets/184807.pdf, ComponentLink5Description=http://www.fairchildsemi.com/ds/FD/FDV305N.pdf, ComponentLink5URL=http://www.fairchildsemi.com/ds/FD/FDV305N.pdf, ComponentLink6Description=https://www.fairchildsemi.com/datasheets/FD/FDV305N.pdf, ComponentLink6URL=https://www.fairchildsemi.com/datasheets/FD/FDV305N.pdf, Dimensions="2.92 x 1.3 x 0.93mm", Height=0.93mm, Length=2.92mm, Manufacturer Part Number=FDV305N, Mounting Type="Surface Mount", Number of Elements per Chip=1, Pin Count=3, Pricing 1="1=0.43, 10=0.341, 100=0.234, 500=0.1604, 1000=0.1203 (USD)", Stock 1=113719, Supplier 1=Digi-Key, Transistor Configuration=Single, Transistor Material=Si, Typical Gate Charge @ Vgs="1.1 nC @ 4.5 V", Typical Turn-Off Delay Time="8 ns", Typical Turn-On Delay Time="4.5 ns", Width=1.3mm
R1 R2 R3 R4 R6 R7 R12 R16 R18 R19 R29: library part RC0805FR-0710KL, "RES SMD 10K OHM 1% 1/8W 0805", Case Code - in=0805, Case Code - mm=2012, Manufacturer=Yageo, Operating Temperature Range="- 55 C to + 155 C", Power Rating="125 mW (1/8 W)", Resistance="10 kOhms", Supplier Part Number 1=311-10.0KCRCT-ND, Temperature Coefficient="100 PPM / C", Tolerance="1 %", Voltage Rating="150 V", Manufacturer Part Number=RC0805FR-0710KL, Packaging=Reel, Pricing 1="1=0.1, 10=0.046, 100=0.0186, 1000=0.0084, 2500=0.0073 (USD)", Product="Thick Film Resistors General Purpose", Series=RC, Stock 1=31531286, Supplier 1=Digi-Key, Termination Style=SMD/SMT
R5 R8 R10 R11 R17 R20 R21: library part RC0402FR-0710RL, "RES SMD 10 OHM 1% 1/16W 0402", Case Code - in=0402, Case Code - mm=1005, Manufacturer=Yageo, Operating Temperature Range="- 55 C to + 155 C", Power Rating="62.5 mW (1/16 W)", Resistance="10 Ohms", Supplier Part Number 1=311-10.0LRCT-ND, Temperature Coefficient="100 PPM / C", Tolerance="1 %", Voltage Rating="50 V", ComponentLink1Description=http://www.farnell.com/datasheets/1018594.pdf, ComponentLink1URL=http://www.farnell.com/datasheets/1018594.pdf, ComponentLink2Description=https://www.verical.com/server-webapp/html/getDatasheet?partID=323697, ComponentLink2URL=https://www.verical.com/server-webapp/html/getDatasheet?partID=323697, Manufacturer Part Number=RC0402FR-0710RL, Packaging=Reel, Pricing 1="1=0.1, 10=0.027, 100=0.0111, 1000=0.005, 2500=0.0043, 5000=0.0036 (USD)", Product="Thick Film Resistors General Purpose", Series=RC, Stock 1=1306139, Supplier 1=Digi-Key, Termination Style=SMD/SMT
R9: library part RT0805FRE07100RL, "RES SMD 100 OHM 1% 1/8W 0805", Case Code - in=0805, Case Code - mm=2012, Manufacturer=Yageo, Operating Temperature Range="- 55 C to + 125 C", Package / Case="0805 (2012 metric)", Power Rating="125 mW (1/8 W)", Resistance="100 Ohms", Supplier Part Number 1=YAG3360CT-ND, Temperature Coefficient="50 PPM / C", Tolerance="1 %", Voltage Rating="150 V", Brand=Yageo, ComponentLink1Description=http://www.yageo.com/NewPortal/yageodocoutput?fileName=/pdf/R-Chip/PYu-RT_1-to-0.05_RoHS_L_5.pdf, ComponentLink1URL=http://www.yageo.com/NewPortal/yageodocoutput?fileName=/pdf/R-Chip/PYu-RT_1-to-0.05_RoHS_L_5.pdf, ComponentLink2Description=http://www.mouser.com/ds/2/447/yageodocoutput-1125656.pdf, ComponentLink2URL=http://www.mouser.com/ds/2/447/yageodocoutput-1125656.pdf, ComponentLink3Description=http://www.farnell.com/datasheets/442970.pdf, ComponentLink3URL=http://www.farnell.com/datasheets/442970.pdf, Height="0.5 mm", Length="2 mm", Manufacturer Part Number=RT0805FRE07100RL, Packaging=Reel, Pricing 1="1=0.11, 10=0.097, 100=0.0375, 1000=0.0165, 2500=0.0142 (USD)", Product="Thin Film Resistors SMD", Product Category="Thin Film Resistors", RoHS=True, Series=RT, Stock 1=7, Supplier 1=Digi-Key, Termination Style=SMD/SMT, Type="High Precision, High Stability", Unit Weight="0.000194 oz", Width="1.2 mm"
R13 R14 R15 R23 R24: library part RC0805FR-0766R5L, "Thick Film Resistors - SMD 66.5 OHM 1%", Case Code - in=0805, Case Code - mm=2012, Case Height="0.5 mm", Case Length="2 mm", Case Width="1.25 mm", Manufacturer=Yageo, Operating Temperature Range="- 55 C to + 155 C", Package / Case="0805 (2012 metric)", Power Rating="125 mW (1/8 W)", Resistance="66.5 Ohms", Supplier Part Number 1=311-66.5CRCT-ND, Temperature Coefficient="100 PPM / C", Tolerance="1 %", Voltage Rating="150 V", Brand=Yageo, Dimensions="1.25 mm W x 2 mm L x 0.5 mm H", Manufacturer Part Number=RC0805FR-0766R5L, Packaging=Reel, Pricing 1="1=0.1, 10=0.056, 100=0.0228, 1000=0.0102, 2500=0.0089 (USD)", Product="Thick Film Resistors General Purpose", Product Category="Thick Film Resistors - SMD", RoHS=Details, Series=RC, Stock 1=162629, Supplier 1=Digi-Key, Termination Style=SMD/SMT, Type="General Purpose Chip Resistor Surface Mount"
R22: library part AC0805FR-07150RL, "Thick Film Resistors - SMD 1/8W 150ohm 1%", Case Code - in=0805, Case Code - mm=2012, Case Height="0.5 mm", Case Length="2 mm", Case Width="1.25 mm", Manufacturer=Yageo, Operating Temperature Range="- 55 C to + 155 C", Package / Case="0805 (2012 metric)", Power Rating="125 mW (1/8 W)", Resistance="150 Ohms", Supplier Part Number 1=YAG3694CT-ND, Temperature Coefficient="100 PPM / C", Tolerance="1 %", Voltage Rating="150 V", Brand=Yageo, Dimensions="1.25 mm W x 2 mm L x 0.5 mm H", Manufacturer Part Number=AC0805FR-07150RL, Packaging=Reel, Pricing 1="1=0.1, 10=0.055, 100=0.0225, 1000=0.0101, 2500=0.0088 (USD)", Product="Thick Film Resistors SMD", Product Category="Thick Film Resistors - SMD", RoHS=Details, Series=AC, Stock 1=32315, Supplier 1=Digi-Key, Termination Style=SMD/SMT, Type="Chip Resistor Surface Mount"
R25 R26: library part AC0805FR-07220RL, "Thick Film Resistors - SMD 1/8W 220ohm 1%", Case Code - in=0805, Case Code - mm=2012, Case Height="0.5 mm", Case Length="2 mm", Case Width="1.25 mm", Manufacturer=Yageo, Operating Temperature Range="- 55 C to + 155 C", Package / Case="0805 (2012 metric)", Power Rating="125 mW (1/8 W)", Resistance="220 Ohms", Supplier Part Number 1=YAG3711CT-ND, Temperature Coefficient="100 PPM / C", Tolerance="1 %", Voltage Rating="150 V", Brand=Yageo, Dimensions="1.25 mm W x 2 mm L x 0.5 mm H", Manufacturer Part Number=AC0805FR-07220RL, Packaging=Reel, Pricing 1="1=0.1, 10=0.055, 100=0.0225, 1000=0.0101, 2500=0.0088 (USD)", Product="Thick Film Resistors SMD", Product Category="Thick Film Resistors - SMD", RoHS=Details, Series=AC, Stock 1=11948, Supplier 1=Digi-Key, Termination Style=SMD/SMT, Type="Chip Resistor Surface Mount"
R27: library part RC0805FR-071KL, "RES SMD 1K OHM 1% 1/8W 0805", Case Code - in=0805, Case Code - mm=2012, Manufacturer=Yageo, Operating Temperature Range="- 55 C to + 155 C", Power Rating="125 mW (1/8 W)", Resistance="1 kOhms", Supplier Part Number 1=311-1.00KCRCT-ND, Temperature Coefficient="100 PPM / C", Tolerance="1 %", Voltage Rating="150 V", Manufacturer Part Number=RC0805FR-071KL, Packaging=Reel, Pricing 1="1=0.1, 10=0.046, 100=0.0186, 1000=0.0084, 2500=0.0073 (USD)", Product="Thick Film Resistors General Purpose", Series=RC, Stock 1=1262363, Supplier 1=Digi-Key, Termination Style=SMD/SMT
R28: library part AC0805FR-0712KL, "Res Thick Film 0805 12K Ohm 1% 0.125W(1/8W) ±100ppm/C Sulfur Resistant Molded SMD Automotive Paper T/R", Case Style=Molded, Manufacturer=Yageo, Operating Temp Range="-55C to 155C", Package / Case=0805, Power Rating(s)=1/8W, Resistance=12kohm, Supplier Part Number 1=YAG3692CT-ND, Temperature Coefficient=±100, Tolerance (+ or -)=1%, Construction=Rectangular, Failure Rate="Not Required", Manufacturer Part Number=AC0805FR-0712KL, Military Standard="Not Required", Packaging="Tape and Reel", Pricing 1="1=0.1, 10=0.055, 100=0.0225, 1000=0.0101, 2500=0.0088 (USD)", Product Depth (mm)=1.25mm, Product Height (mm)=0.5mm, Product Length (mm)=2mm, Stock 1=218, Supplier 1=Digi-Key, Termination Style="Not Required", Type="Thick Film"
R30: library part RC0805FR-072KL, "RES SMD 2K OHM 1% 1/8W 0805", Case Code - in=0805, Case Code - mm=2012, Manufacturer=Yageo, Operating Temperature Range="- 55 C to + 155 C", Power Rating="125 mW (1/8 W)", Resistance="2 kOhms", Supplier Part Number 1=311-2.00KCRCT-ND, Temperature Coefficient="100 PPM / C", Tolerance="1 %", Voltage Rating="150 V", Manufacturer Part Number=RC0805FR-072KL, Packaging=Reel, Pricing 1="1=0.1, 10=0.046, 100=0.0186, 1000=0.0084, 2500=0.0073 (USD)", Product="Thick Film Resistors General Purpose", Series=RC, Stock 1=993055, Supplier 1=Digi-Key, Termination Style=SMD/SMT
R31 R32: library part RC0402FR-0733RL, "YAGEO (PHYCOMP)         RC0402FR-0733RL             SMD Chip Resistor, Thick Film, 33 ohm, 50 V, 0402 [1005 Metric], 62.5 mW,  1%, RC Series", Manufacturer=Yageo, Power Rating=62.5mW, Resistance=33ohm, Resistance Tolerance="± 1%", Resistor Case Style="0402 [1005 Metric]", Resistor Element Type="Thick Film", Supplier Part Number 1=311-33.0LRCT-ND, Temperature Coefficient="± 100ppm/°C", Voltage Rating=50V, ComponentLink1Description=https://www.verical.com/server-webapp/html/getDatasheet?partID=329253, ComponentLink1URL=https://www.verical.com/server-webapp/html/getDatasheet?partID=329253, ComponentLink2Description=http://www.yageo.com/documents/recent/PYu-RC_Group_51_RoHS_L_9.pdf, ComponentLink2URL=http://www.yageo.com/documents/recent/PYu-RC_Group_51_RoHS_L_9.pdf, ComponentLink3Description=http://www.farnell.com/datasheets/1018594.pdf, ComponentLink3URL=http://www.farnell.com/datasheets/1018594.pdf, ComponentLink4Description=http://documents.rs-components.com/techlib://itc_doclist_GB.htm?stockno=6186734, ComponentLink4URL=http://documents.rs-components.com/techlib://itc_doclist_GB.htm?stockno=6186734, ComponentLink5Description=http://www.yageo.com/documents/recent/PYu-RC0402_51_RoHS_L_6_r.pdf, ComponentLink5URL=http://www.yageo.com/documents/recent/PYu-RC0402_51_RoHS_L_6_r.pdf, Manufacturer Part Number=RC0402FR-0733RL, MSL="MSL 1 - Unlimited", Packaging="Cut Tape", Pricing 1="1=0.1, 10=0.018, 100=0.0073, 1000=0.0033, 2500=0.0029, 5000=0.0024 (USD)", Product Range="RC Series", Stock 1=10530829, Supplier 1=Digi-Key, SVHC="To Be Advised"
SW1 SW3 SW4 SW5 SW6 SW7: "Switch Push Button OFF (ON) SPST Round Button 0.05A 24VDC Momentary Contact PC Pins Thru-Hole", Actuator Color=Black, Contact Rating @ Voltage=0.05A@24VDC, Dielectric Strength="500 VAC", Manufacturer="TE Connectivity Alcoswitch", Maximum AC Voltage Rating=N/A, Maximum Contact Resistance="100 mOhm", Maximum DC Voltage Rating="24 V", Minimum Insulation Resistance="100 MOhm", Operating Temperature="-35 to 85 C", Supplier Part Number 1=450-1650-ND, Actuator Length="1.4 mm", Actuator Material="Polybutylene Terephthalate", Actuator Style="Round Button", Base Material=N/A, Body Orientation=Straight, Bushing Type=Unthreaded, Contact Material="Copper Alloy", Contact Plating=Silver, Dimension="5.99 x 5 mm", Electrical Life="100000 Cycles", Family=1825910, Function="Momentary Contact", Housing Material=N/A, Illumination=N/R, Manufacturer Part Number=1825910-6, Mechanical Life="100000 Cycles", Mounting="Through Hole", Packaging=N/A, Part No=1825910-6, Pole Throw Configuration=SPST, Pricing 1="1=0.1, 10=0.093, 25=0.0892, 50=0.0862, 100=0.0814, 250=0.0766, 500=0.0734, 1000=0.0558, 5000=0.0463 (USD)", Product Weight=N/A, RoHS=Yes, Seal Description=N/A, Seal Location=N/A, Stock 1=75696, Supplier 1=Digi-Key, Switch Configuration="OFF (ON)", Terminal Type="PC Pins", Thread Size=N/R
SW2: "E-SWITCH         EG1218             SLIDE SWITCH, SPDT, 200MA", Current Rating="200mA (DC)", Manufacturer=E-Switch, Operating Force=250gf, Operating Temperature="-20°C ~ 70°C", Standard Package=1,000, Supplier Part Number 1=EG1903-ND, Voltage Rating - AC=-, Voltage Rating - DC=30V, 3D Model=EG1218.stp, Actuator Length=2.00mm, Actuator Material=-, Actuator Type=Standard, Catalog Drawings=EG1218, Category=Switches, Circuit=SPDT, Contact Finish=Silver, Contact Material="Copper Alloy", Contact Timing="Non-Shorting (BBM)", Electrical Life=-, Family="Slide Switches", Features=-, Manufacturer Part Number=EG1218, Mechanical Life=-, Mounting Type="Through Hole", Online Catalog="EG Series", Other Names="EG1903 P040040", Packaging=Bulk, Pricing 1="1=0.58, 10=0.559, 25=0.5472, 50=0.4888, 100=0.4656, 250=0.454, 500=0.3841, 1000=0.3725, 5000=0.3259 (USD)", Product Training Modules="Switch Basics Power Switch Overview", Series=EG, Stock 1=39243, Supplier 1=Digi-Key, Switch Function=On-On, Switch Travel=2.50mm, Termination Style="PC Pin"
TP1 TP6 TP7 TP9 TP10 TP11: library part TEST_PAD_1mm
U1: "ARM® Cortex®-M0+ STM32L0 Microcontroller IC 32-Bit 32MHz 64KB (64K x 8) FLASH 48-LQFP (7x7)", Manufacturer=STMicroelectronics, Supplier Part Number 1=497-17496-ND, Manufacturer Part Number=STM32L071C8T6, Pricing 1="1=3.15, 10=2.827, 100=2.3166, 500=1.9721, 1000=1.6632 (USD)", Stock 1=1883, Supplier 1=Digi-Key
U2: "TEXAS INSTRUMENTS   SN74LVC1T45DBVR   Transceiver, Non-Inverting, 3-State, 1 Input, 1.65V to 5.5V, SOT-23-6", High Level Output Current="-32 mA", Low Level Output Current="32 mA", Manufacturer="Texas Instruments", Operating Supply Voltage (Max)="5.5 V", Operating Supply Voltage (Min)="1.65 V", Operating Supply Voltage (Typ)="1.8/2.5/3.3/5 V", Operating Temperature (Max)=85C, Operating Temperature (Min)=-40C, Operating Temperature Classification=Industrial, Operating Temp Range="-40C to 85C", Package Type=SOT-23, Quiescent Current="3 uA", Supplier Part Number 1=296-16843-1-ND, Additional Features="W/Volt Translation", ComponentLink1Description=http://www.jameco.com/Jameco/Products/ProdDS/2000549.pdf, ComponentLink1URL=http://www.jameco.com/Jameco/Products/ProdDS/2000549.pdf, ComponentLink2Description=https://www.verical.com/server-webapp/html/getDatasheet?partID=309359, ComponentLink2URL=https://www.verical.com/server-webapp/html/getDatasheet?partID=309359, ComponentLink3Description=http://www.ti.com/lit/ds/symlink/sn74lvc1t45.pdf, ComponentLink3URL=http://www.ti.com/lit/ds/symlink/sn74lvc1t45.pdf, ComponentLink4Description=http://focus.ti.com/lit/ds/symlink/sn74lvc1t45.pdf, ComponentLink4URL=http://focus.ti.com/lit/ds/symlink/sn74lvc1t45.pdf, DELETED=Compliant, Input Logic Level=LVTTL, Logic Family=LVC, Manufacturer Part Number=SN74LVC1T45DBVR, Mounting="Surface Mount", Number of Channels=1, Number of  Elements=1, Output Logic Level=LVTTL, Output Type=3-State, Packaging="Tape and Reel", Pin Count=6, Polarity=Non-Inverting, Pricing 1="1=0.6, 10=0.51, 100=0.3807, 500=0.2991, 1000=0.2311 (USD)", Propagation Delay Time="36.2 ns", Rad Hardened=No, Stock 1=138438, Supplier 1=Digi-Key, Technology=CMOS
U3 U5: "IC, 2BIT BUS TRANSCEIVER, SSOP-8", High Level Output Current=-32mA, Low Level Output Current=32mA, Manufacturer="Texas Instruments", Operating Supply Voltage (Max)=5.5V, Operating Supply Voltage (Min)=1.65V, Operating Supply Voltage (Typ)=1.8/2.5/3.3/5V, Operating Temperature (Max)=85C, Operating Temperature (Min)=-40C, Operating Temperature Classification=Industrial, Operating Temp Range="-40C to 85C", Package Type=SSOP, Quiescent Current=3uA, Supplier Part Number 1=296-16845-1-ND, Additional Features="W/Volt Translation", ComponentLink1Description=http://www.ti.com/lit/ds/symlink/sn74lvc2t45.pdf, ComponentLink1URL=http://www.ti.com/lit/ds/symlink/sn74lvc2t45.pdf, ComponentLink2Description=http://www.jameco.com/Jameco/Products/ProdDS/1046748.pdf, ComponentLink2URL=http://www.jameco.com/Jameco/Products/ProdDS/1046748.pdf, ComponentLink3Description=https://www.verical.com/server-webapp/html/getDatasheet?partID=190128, ComponentLink3URL=https://www.verical.com/server-webapp/html/getDatasheet?partID=190128, ComponentLink4Description=http://www.ti.com/general/docs/lit/getliterature.tsp?genericPartNumber=SN74LVC2T45&&fileType=pdf, ComponentLink4URL=http://www.ti.com/general/docs/lit/getliterature.tsp?genericPartNumber=SN74LVC2T45&&fileType=pdf, ComponentLink5Description=http://www.farnell.com/datasheets/1882347.pdf, ComponentLink5URL=http://www.farnell.com/datasheets/1882347.pdf, ComponentLink6Description=http://focus.ti.com/lit/ds/symlink/sn74lvc2t45.pdf, ComponentLink6URL=http://focus.ti.com/lit/ds/symlink/sn74lvc2t45.pdf, ComponentLink7Description=http://www.farnell.com/datasheets/1863620.pdf, ComponentLink7URL=http://www.farnell.com/datasheets/1863620.pdf, Input Logic Level=LVTTL/TTL, Logical Function="Voltage Level Translator", Logic Family=LVC, Manufacturer Part Number=SN74LVC2T45DCTR, Mounting="Surface Mount", Number of Channels=2, Number of  Elements=1, Output Logic Level=LVCMOS, Output Type=3-State, Packaging="Tape and Reel", Pin Count=8, Polarity=Non-Inverting, Pricing 1="1=0.61, 10=0.537, 100=0.4117, 500=0.3255, 1000=0.2604 (USD)", Propagation Delay Time=45.2ns, Stock 1=236711, Supplier 1=Digi-Key, Technology=CMOS
U4: "LCD COG GRAPHIC 128X32", Display Color=N/A, Manufacturer="Newhaven Display", Operating Temperature="-20 to 70 C", Supplier Part Number 1=NHD-C12832A1Z-FSW-FBW-3V3-ND, Active Area="31.98x7.98 mm", Backlight=LED, COO=CN, Dimension="41.4 x 24.3 x 4.9mm", Display Mode=Transflective, Display Size=N/A, ECCN=EAR99, Family=NHD-C12832A1Z-FSW-FBW-3V3, HTS=8531200020, LCD Type=FSTN, Manufacturer Part Number=NHD-C12832A1Z-FSW-FBW-3V3, Mounting="Through Hole", Outline Dimensions="41.4x24.3x4 mm", Packaging=N/A, Part No=NHD-C12832A1Z-FSW-FBW-3V3, Pin_Count=17, Pricing 1="1=11, 5=10.34, 10=9.68, 50=9.13, 100=8.69, 250=8.25, 500=7.92 (USD)", Resolution Standard=N/A, RoHS=Yes, Stock 1=6491, Supplier 1="Newhaven Display", Supplier_Package=N/A, Supplier Standard Pack=100, Touchscreen=No, Typical Brightness=N/A, Typical Contrast Ratio=6:1, Typical Response Time="300 ms"
U6: "6Vin, Single 500mA ULDO, 6 UDFN 1.6x1.6x0.6mm T/R", Current - Limit (Min)=600mA, Current - Output=500mA, Manufacturer=Microchip, Operating Temperature="-40°C ~ 125°C", Package / Case="6-UFDFN Exposed Pad, 6-TMLF®", Supplier Device Package="6-TMLF® (1.6x1.6)", Supplier Part Number 1=576-3679-1-ND, Voltage - Dropout (Typical)="0.16V @ 500mA", Voltage - Input="Up to 6V", Voltage - Output=3V, Category="Integrated Circuits (ICs)", Family="PMIC - Voltage Regulators - Linear", Manufacturer Part Number=MIC5353-3.0YMT-TR, Mounting Type="Surface Mount", Number of Regulators=1, Packaging=Digi-Reel®, Pricing 1="1=0.35, 25=0.2884, 100=0.2678 (USD)", Regulator Topology="Positive Fixed", Series=-, Stock 1=4083, Supplier 1=Digi-Key
U7: "MICROCHIP         MIC5353-3.3YMT-TR             Fixed LDO Voltage Regulator, 2.6V to 6V, 160mV Dropout, 3.3Vout, 500mAout, MLF-6", Adjustable Output Voltage Max=-, Dropout Voltage Vdo=160mV, Fixed Output Voltage Nom.=3.3V, Input Voltage Max=6V, Input Voltage Min=2.6V, LDO Regulator Case Style=MLF, Manufacturer=Microchip, Operating Temperature Max=125°C, Operating Temperature Min=-40°C, Output Current=500mA, Supplier Part Number 1=576-3680-1-ND, Adjustable Output Voltage Min=-, Automotive Qualification Standard=-, Manufacturer Part Number=MIC5353-3.3YMT-TR, MSL="MSL 1 - Unlimited", No. of Pins=6Pins, Output Type=Fixed, Packaging="Cut Tape", Pricing 1="1=0.43, 25=0.35, 100=0.325 (USD)", Product Range="3.3V 500mA LDO Voltage Regulators", Stock 1=12369, Supplier 1=Digi-Key, SVHC="No SVHC (17-Dec-2015)"
U8: "IC USB HS DUAL UART/FIFO 64-LQFP", Manufacturer=FTDI, Operating Supply Voltage (Max)=3.63V, Operating Supply Voltage (Min)=1.62V, Operating Supply Voltage (Typ)=1.8/3.3V, Operating Temperature (Max)=85C, Operating Temperature (Min)=-40C, Operating Temperature Classification=Industrial, Package Type=LQFP, Supplier Part Number 1=768-1024-1-ND, Supply Current=70(Typ)mA, Data Rate=480Mbps, Interface Circuit Standard 1=RS-232/RS-422/RS-485, Manufacturer Part Number=FT2232HL-REEL, Mounting="Surface Mount", Number of Channels=2, Packaging="Tape and Reel", Pin Count=64, Pricing 1="1=6.71, 10=6.2, 100=5.4, 250=4.56, 500=4.06 (USD)", Stock 1=30383, Supplier 1=Digi-Key, Transmitter and Receiver FIFO Counter=No
U9: "EEPROM 128x16", Frequency="2 MHz", Manufacturer=Microchip, Operating Supply Voltage (Max)="5.5 V", Operating Supply Voltage (Min)="2.5 V", Operating Supply Voltage (Typ)="3.3/5 V", Operating Temperature (Max)=85C, Operating Temperature (Min)=-40C, Operating Temperature Classification=Industrial, Operating Temp Range="-40C to 85C", Package Type=SOT-23, Supplier Part Number 1=93LC56BT-I/OTCT-ND, Supply Current="2 mA", Access Time (Max)="250 ns", Data Retention=200, Density="2048 Bit", Interface Type="Serial (Microwire)", Manufacturer Part Number=93LC56BT-I/OT, Mounting="Surface Mount", Organization=128x16, Packaging="Tape and Reel", Pin Count=6, Pricing 1="1=0.23, 25=0.2164, 100=0.2119 (USD)", Programmable=Yes, Rad Hardened=No, Stock 1=24330, Supplier 1=Digi-Key, Write Protection=No
Y1: library part ABM10AIG24.000MHZ4ZT3, Manufacturer=Abracon, Supplier Part Number 1=535-13363-1-ND, Manufacturer Part Number=ABM10AIG24.000MHZ4ZT3, Stock 1=0, Supplier 1=Digi-Key